# EAGLE board Glorious Trug-Jaagub (EAGLE 9.7.0)

Size 317.05 x 106.12 mm. Coordinates in mm from the lower left corner, seen from the top.
Outline: 0,0 317.05,0 317.05,106.12 0,106.12 0,0
Copper layers (1*16): Top 0.035mm / dielectric 1.5mm / Bottom 0.035mm
Design rules "default": minimum track width 6mil, minimum drill 0.35mm, track to track 6mil, track to pad 6mil, pad to pad 6mil, via to via 6mil, smd to smd 6mil, copper to edge 40mil, drill to drill 6mil, minimum pad ring 10mil, minimum via ring 8mil, stop-mask expansion 4mil, vias tented up to drill 0mil, thermal gap 10mil

## Footprints (pad centres in the part's own frame; a part is rotated, then mirrored left to right if it is on the bottom)
CAP-THRU-2.54MM = drill 1.016 pad 1.88: 1 -1.27,0; 2 1.27,0
DIODE-AXIAL = drill 1: 1 -5.08,0; 2 5.08,0
LEDRD254W60D565H860B = drill 0.981 pad 1.581: 1 -1.27,0; 2 1.27,0
LEDRD254W60D565H860B_G = drill 0.981 pad 1.581: 1 -1.27,0; 2 1.27,0
LEDRD254W60D565H860B_Y = drill 0.981 pad 1.581: 1 -1.27,0; 2 1.27,0
RESAD1016W63L850D250B = drill 0.83 pad 1.43: 1 -5.08,0; 2 5.08,0
GL5528 = drill 0.8 pad 1.4: 1 -1.702,0; 2 1.702,0
SWITCH-MOMENTARY-PTH-6.5MM = drill 1.016 pad 1.88: 1 -3.251,2.261; 2 3.251,2.261; 3 -3.251,-2.261; 4 3.251,-2.261
TO220BV = drill 1.016 long: D 0,-2.54; G -2.54,-2.54; S 2.54,-2.54
DIP762W53P254L1969H508Q16B = drill 0.743 pad 1.343: 1 -3.81,8.89; 2 -3.81,6.35; 3 -3.81,3.81; 4 -3.81,1.27; 5 -3.81,-1.27; 6 -3.81,-3.81; 7 -3.81,-6.35; 8 -3.81,-8.89; 9 3.81,-8.89; 10 3.81,-6.35; 11 3.81,-3.81; 12 3.81,-1.27; 13 3.81,1.27; 14 3.81,3.81; 15 3.81,6.35; 16 3.81,8.89
ARDUINO-UNO-R3-SHIELD = drill 1.016 pad 1.88: 3.3V 24.13,-2.54; 5V 24.13,0; A0 24.13,12.7; A1 24.13,15.24; A2 24.13,17.78; A3 24.13,20.32; A4 24.13,22.86; A5 24.13,25.4; AREF -24.13,-13.97; D2 -24.13,20.32; D3 -24.13,17.78; D4 -24.13,15.24; D5 -24.13,12.7; D6 -24.13,10.16; D7 -24.13,7.62; D8 -24.13,3.81; D9 -24.13,1.27; D10 -24.13,-1.27; D11 -24.13,-3.81; D12 -24.13,-6.35; D13 -24.13,-8.89; GND@0 24.13,2.54; GND@1 24.13,5.08; GND@2 -24.13,-11.43; IOREF 24.13,-7.62; NC 24.13,-10.16; RES 24.13,-5.08; RX -24.13,25.4; SCL -24.13,-19.05; SDA -24.13,-16.51; TX -24.13,22.86; VIN 24.13,7.62
DIP826W53P254L959H508Q8B = drill 0.786 pad 1.386: 1 -4.13,3.81; 2 -4.13,1.27; 3 -4.13,-1.27; 4 -4.13,-3.81; 5 4.13,-3.81; 6 4.13,-1.27; 7 4.13,1.27; 8 4.13,3.81

## Placement (x,y rotation side)
C1  1u  [CAP-THRU-2.54MM]  247.84,21.47 0 top
C2  10u  [CAP-THRU-2.54MM]  311.34,44.33 0 top
D1  DIODEDIODE-AXIAL  [DIODE-AXIAL]  284.67,26.55 180 top
D2  DIODEDIODE-AXIAL  [DIODE-AXIAL]  297.37,26.55 180 top
DPB1RED  RED  [LEDRD254W60D565H860B]  265.62,29.09 180 top
DPL1GREEN  GREEN  [LEDRD254W60D565H860B_G]  153.75,6.06 270 top
DPL2GREEN  GREEN  [LEDRD254W60D565H860B_G]  166.45,6.06 270 top
DTL4GREEN  GREEN  [LEDRD254W60D565H860B_G]  128.35,36.54 90 top
DTL4RED  RED  [LEDRD254W60D565H860B]  66.67,35.64 90 top
DTL4YELLOW  YELLOW  [LEDRD254W60D565H860B_Y]  79.38,35.64 90 top
DTL5GREEN  GREEN  [LEDRD254W60D565H860B_G]  166.45,36.54 90 top
DTL5RED  RED  [LEDRD254W60D565H860B]  141.05,36.54 90 top
DTL5YELLOW  YELLOW  [LEDRD254W60D565H860B_Y]  151.21,36.54 90 top
R1  10k  [RESAD1016W63L850D250B]  254.19,16.39 90 top
R2  1k  [RESAD1016W63L850D250B]  10.79,11.51 180 top
R3  10k  [RESAD1016W63L850D250B]  287.21,51.95 90 top
R4  0.3k  [RESAD1016W63L850D250B]  292.29,44.33 0 top
RLDR1  PHOTOCELL_GL5528  [GL5528]  37.47,26.75 0 top
RR1  220  [RESAD1016W63L850D250B]  74.3,31.83 0 top
RR2  220  [RESAD1016W63L850D250B]  61.59,31.83 0 top
RR3  220  [RESAD1016W63L850D250B]  123.27,32.73 0 top
RR4  220  [RESAD1016W63L850D250B]  135.97,32.73 0 top
RR5  220  [RESAD1016W63L850D250B]  148.67,32.73 0 top
RR6  220  [RESAD1016W63L850D250B]  161.37,32.73 0 top
RR9  220  [RESAD1016W63L850D250B]  148.67,14.95 0 top
RR10  220  [RESAD1016W63L850D250B]  161.37,14.95 0 top
RR11  10k  [RESAD1016W63L850D250B]  38.73,19.13 90 top
RR12  1k  [RESAD1016W63L850D250B]  264.35,46.87 180 top
RR13  10k  [RESAD1016W63L850D250B]  277.05,46.87 180 top
RR71  220  [RESAD1016W63L850D250B]  269.43,21.47 0 top
SPB1  SWITCH_MOMENTARY  [SWITCH-MOMENTARY-PTH-6.5MM]  8.26,28.02 90 top
SPB2  SWITCH_MOMENTARY  [SWITCH-MOMENTARY-PTH-6.5MM]  20.95,28.02 90 top
T3  NMOSFET  [TO220BV]  302.45,49.41 0 top
U1  74HC595_PDIP  [DIP762W53P254L1969H508Q16B]  101.68,21.3 90 top
U2  ARDUINO-UNO-R3-SHIELD  [ARDUINO-UNO-R3-SHIELD]  119.4,76.28 270 top
U555  LM555_DIP  [DIP826W53P254L959H508Q8B]  250.38,32.9 90 top

## Library data of the parts
C1 C2 D1 D2 R1-R4 RLDR1 RR1-RR6 RR9-RR13 RR71 SPB1 SPB2 U1 U2 = Tinkercad
DPB1RED DTL4RED DTL5RED = Tinkercad; CATEGORY: Opto-Electronic; SUB-CATEGORY: LED; VALUE: LED_RED
DPL1GREEN DPL2GREEN DTL4GREEN DTL5GREEN = Tinkercad; CATEGORY: Opto-Electronic; SUB-CATEGORY: LED; VALUE: LED_GREEN
DTL4YELLOW DTL5YELLOW = Tinkercad; CATEGORY: Opto-Electronic; SUB-CATEGORY: LED; VALUE: LED_YELLOW
T3 = Tinkercad; CATEGORY: Transistor; SUB-CATEGORY: MOSFET; TYPE: N-Channel
U555 = Tinkercad; CATEGORY: IC_Clock-Timing; CURRENT-SUPPLY: 10mA; DESCRIPTION: IC OSC SINGLE TIMER 100KHZ 8-DIP; FREQUENCY: 100kHz; MANUFACTURER: Texas Instruments; MPN: LM555CN/NOPB; OPERATING_TEMP: 0°C to 70°C; PART_STATUS: Active; ROHS_COMPLIANT: ROHS3 Compliant; SUB-CATEGORY: Timer

## Nets
DPB1RED_C: DPB1RED.2 RR71.1
DPL1GREEN_A: DPL1GREEN.1 RR9.2
DPL2GREEN_A: DPL2GREEN.1 RR10.2
DTL4GREEN_A: DTL4GREEN.1 RR3.2
DTL4RED_A: DTL4RED.1 RR2.2
DTL4YELLOW_A: DTL4YELLOW.1 RR1.2
DTL5GREEN_A: DTL5GREEN.1 RR6.2
DTL5RED_A: DTL5RED.1 RR4.2
T3_D: C2.1 T3.D
T3_G: R4.2 T3.G
U1_Q0: RR2.1 U1.15
U1_Q1: RR1.1 U1.1
U1_Q2: RR3.1 U1.2
U1_Q3: RR4.1 U1.3
U1_Q4: RR5.1 U1.4
U1_Q5: RR6.1 U1.5
U1_Q6: D2.1 U1.6
U1_Q7: RR9.1 RR10.1 U1.7
U2_5V: RLDR1.1 RR12.1 SPB1.1 SPB1.2 SPB2.1 SPB2.2 U1.10 U1.16 U2.5V U555.8
U2_A3: RLDR1.2 U2.A3
U2_D9: D1.1 R3.1 R4.1 U2.D9
U2_D10: R2.2 SPB1.3 SPB1.4 SPB2.3 SPB2.4 U2.D10
U2_D11: U1.11 U2.D11
U2_D12: U1.12 U2.D12
U2_D13: U1.14 U2.D13
U2_GND: C1.1 DPL1GREEN.2 DPL2GREEN.2 DTL4GREEN.2 DTL4RED.2 DTL4YELLOW.2 DTL5GREEN.2 DTL5RED.2 DTL5YELLOW.2 R1.1 R2.1 R3.2 RR71.2 T3.S U1.8 U1.13 U2.GND@0 U2.GND@1 U2.GND@2 U555.1
U555_!RST: D1.2 D2.2 R1.2 U555.4
U555_DIS: RR12.2 RR13.2 U555.7
U555_OUT: DPB1RED.1 U555.3
U555_THR: C1.2 C2.2 RR13.1 U555.2 U555.6

## Tracks (layer width: path | path; a pad name or v marks a point on that pad's centre or on a via)
DPB1RED_C  (1 unrouted)
DPL1GREEN_A  (1 unrouted)
DPL2GREEN_A  (1 unrouted)
DTL4GREEN_A  (1 unrouted)
DTL4RED_A  (1 unrouted)
DTL4YELLOW_A  (1 unrouted)
DTL5GREEN_A  (1 unrouted)
DTL5RED_A  (1 unrouted)
T3_D  (1 unrouted)
T3_G  (1 unrouted)
U1_Q0  (1 unrouted)
U1_Q1  (1 unrouted)
U1_Q2  (1 unrouted)
U1_Q3  (1 unrouted)
U1_Q4  (1 unrouted)
U1_Q5  (1 unrouted)
U1_Q6  (1 unrouted)
U1_Q7  (2 unrouted)
U2_5V  (9 unrouted)
U2_A3  (1 unrouted)
U2_D9  (3 unrouted)
U2_D10  (5 unrouted)
U2_D11  (1 unrouted)
U2_D12  (1 unrouted)
U2_D13  (1 unrouted)
U2_GND  (19 unrouted)
U555_!RST  (3 unrouted)
U555_DIS  (2 unrouted)
U555_OUT  (1 unrouted)
U555_THR  (4 unrouted)